# EAGLE board smd_9 (EAGLE 9.3.0)
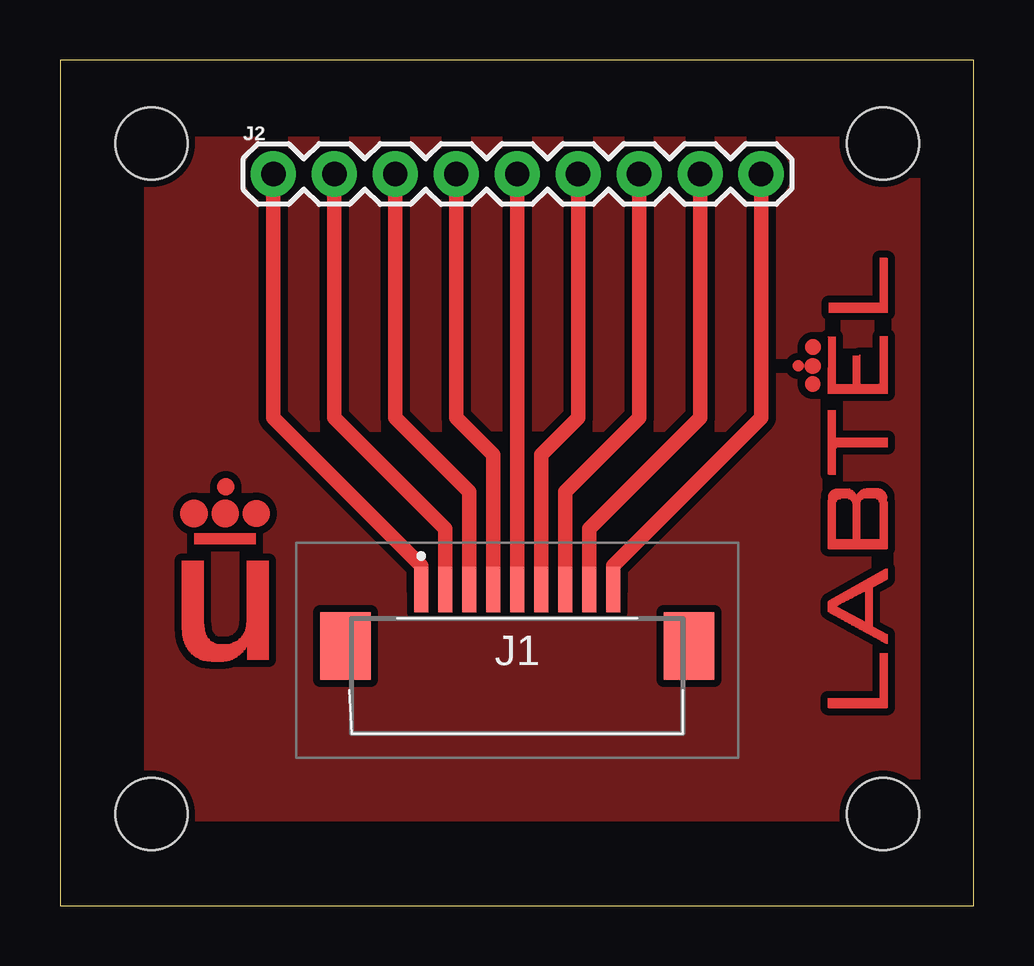
[diagram p0: board, top side]
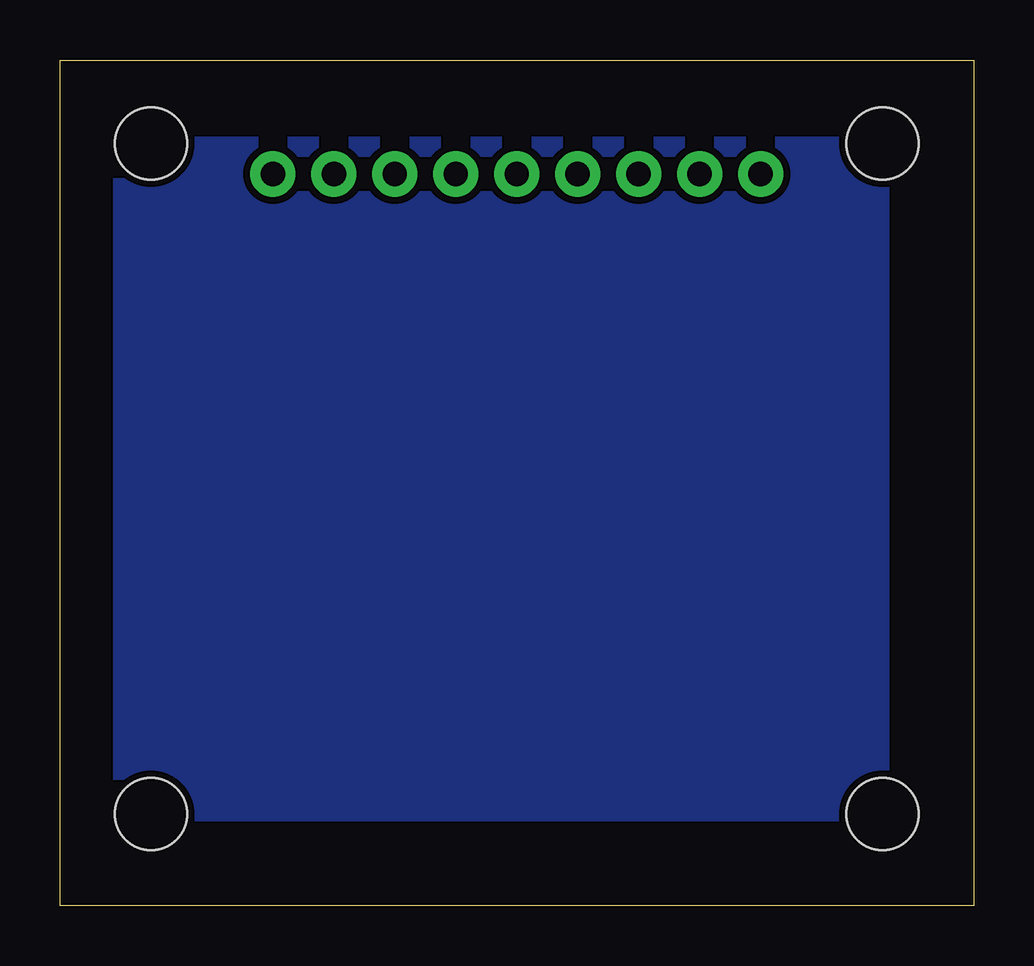
[diagram p1: board, bottom side, seen from below]

Size 38.08 x 35.23 mm. Coordinates in mm from the lower left corner, seen from the top.
Outline: 0,0 38.08,0 38.08,35.23 0,35.23 0,0
Copper layers (1*16): Top 0.035mm / dielectric 1.5mm / Bottom 0.035mm
Design rules "Fabricacion_interna_microfresadora": minimum track width 12mil, minimum drill 28mil, track to track 12mil, track to pad 12mil, pad to pad 12mil, via to via 12mil, smd to smd 0mil, copper to edge 12mil, drill to drill 12mil, minimum pad ring 6mil, minimum via ring 6mil, stop-mask expansion 4mil, vias tented up to drill 0mil, thermal gap 12mil
Net classes: 0 default: clearance 0.254 mm
Holes 3 mm at 3.81,3.81 34.29,3.81 34.29,31.75 3.81,31.75

## Footprints (pad centres in the part's own frame; a part is rotated, then mirrored left to right if it is on the bottom)
527930970 = smd 0.6 x 1.9: 1 -4,3; 2 -3,3; 3 -2,3; 4 -1,3; 5 0,3; 6 1,3; 7 2,3; 8 3,3; 9 4,3 | smd 2.1 x 2.8: MP1 -7.15,0.65; MP2 7.15,0.65
1X09 = drill 1.016 pad 1.88: 1 0,0; 2 2.54,0; 3 5.08,0; 4 7.62,0; 5 10.16,0; 6 12.7,0; 7 15.24,0; 8 17.78,0; 9 20.32,0

## Placement (x,y rotation side)
J1  52793-0970  [527930970]  19.05,10.16 0 top
J2  [1X09]  8.89,30.48 0 top
U$1  [URJC]  5.08,10.16 0 top
U$2  [LABTEL]  35.56,7.62 90 top

## Library data of the parts
J1 = 52793-0970; ALLIED_NUMBER: 71463739; ALLIED_PRICE-STOCK: https://www.alliedelec.com/molexincorporated-52793-0970/71463739/; DESCRIPTION: FFC & FPC Connectors 1.0 FFC Non ZIF HsgA ssySMT 9CktEmbsTpPkg; HEIGHT: 3.3mm; MANUFACTURER_NAME: Molex; MANUFACTURER_PART_NUMBER: 52793-0970; MOUSER_PART_NUMBER: 538-52793-0970; MOUSER_PRICE-STOCK: https://www.mouser.com/Search/Refine.aspx?Keyword=538-52793-0970
J2 = SparkFun-Connectors
U$1 U$2 = logos_top

## Nets
N$1: J1.1 J2.1
N$2: J1.2 J2.2
N$3: J1.3 J2.3
N$4: J1.4 J2.4
N$5: J1.5 J2.5
N$6: J1.6 J2.6
N$7: J1.7 J2.7
N$8: J1.8 J2.8
N$9: J1.9 J2.9

## Tracks (layer width: path | path; a pad name or v marks a point on that pad's centre or on a via)
GND
  pour Bottom: 3.81,31.75 35.56,31.75 35.56,3.81 3.81,3.81
  pour Top: 3.81,31.75 35.56,31.75 35.56,3.81 3.81,3.81
N$1
  Top 0.61: J1.1 15.05,14.16 8.89,20.32 J2.1
N$2
  Top 0.61: J1.2 16.05,15.7 11.43,20.32 J2.2
N$3
  Top 0.61: J1.3 17.05,17.24 13.97,20.32 J2.3
N$4
  Top 0.61: J1.4 18.05,18.78 16.51,20.32 J2.4
N$5
  Top 0.61: J1.5 J2.5
N$6
  Top 0.61: J1.6 20.05,18.78 21.59,20.32 J2.6
N$7
  Top 0.61: J1.7 21.05,17.24 24.13,20.32 J2.7
N$8
  Top 0.61: J1.8 22.05,15.7 26.67,20.32 J2.8
N$9
  Top 0.61: J1.9 23.05,14.16 29.21,20.32 J2.9